# Allegro board pc054a_toplevel_27.brd
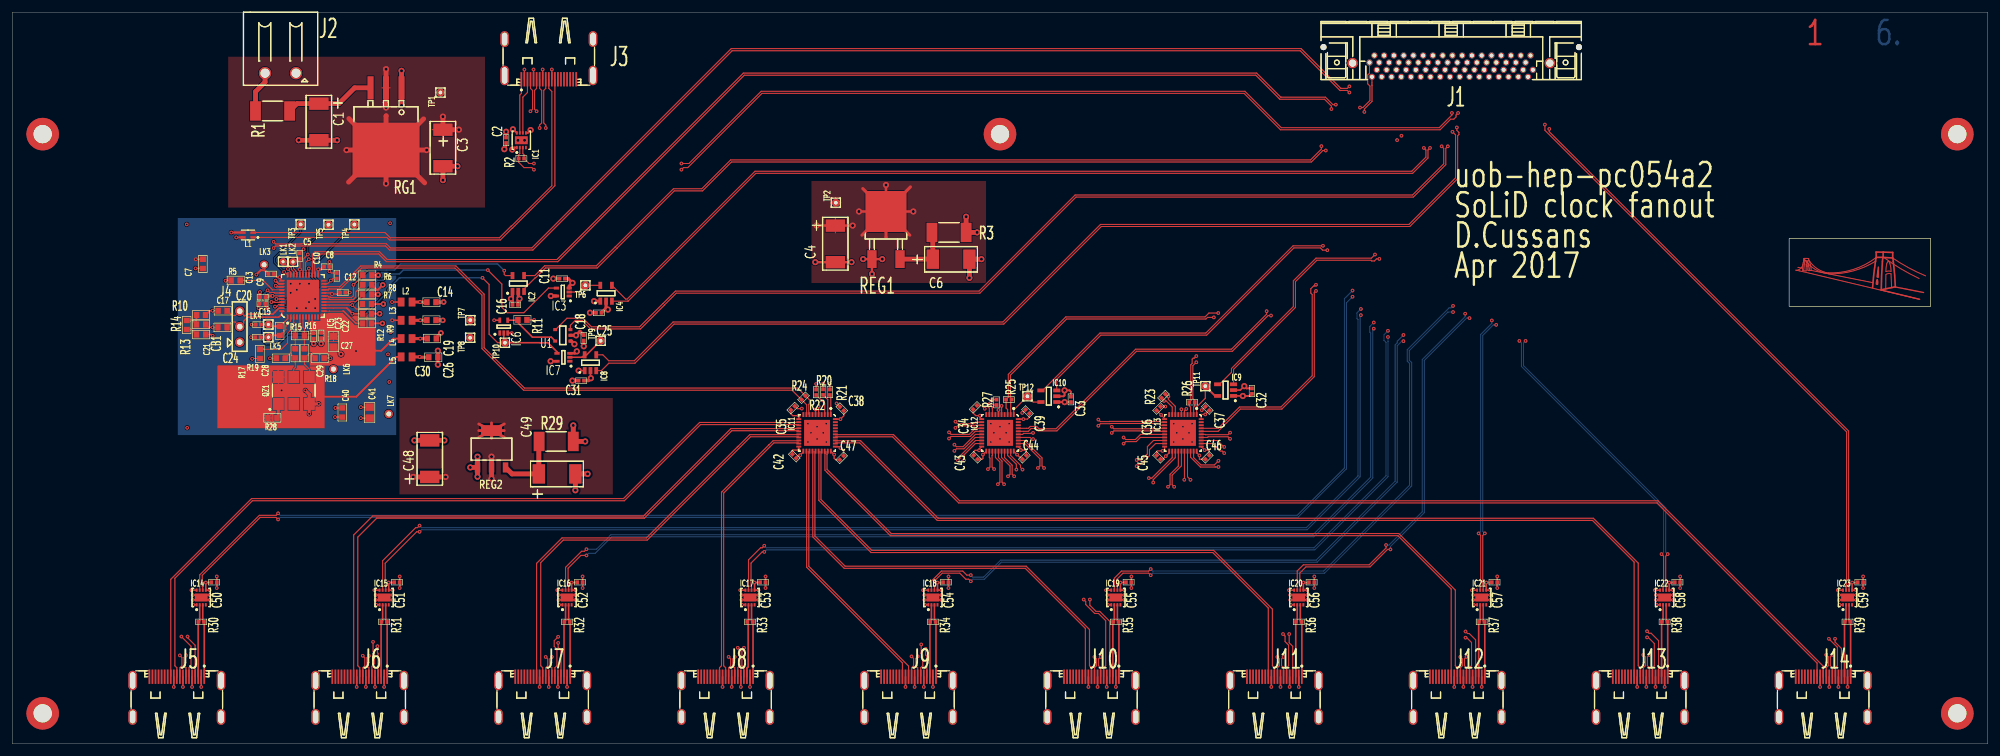
[diagram p0: board, top side]
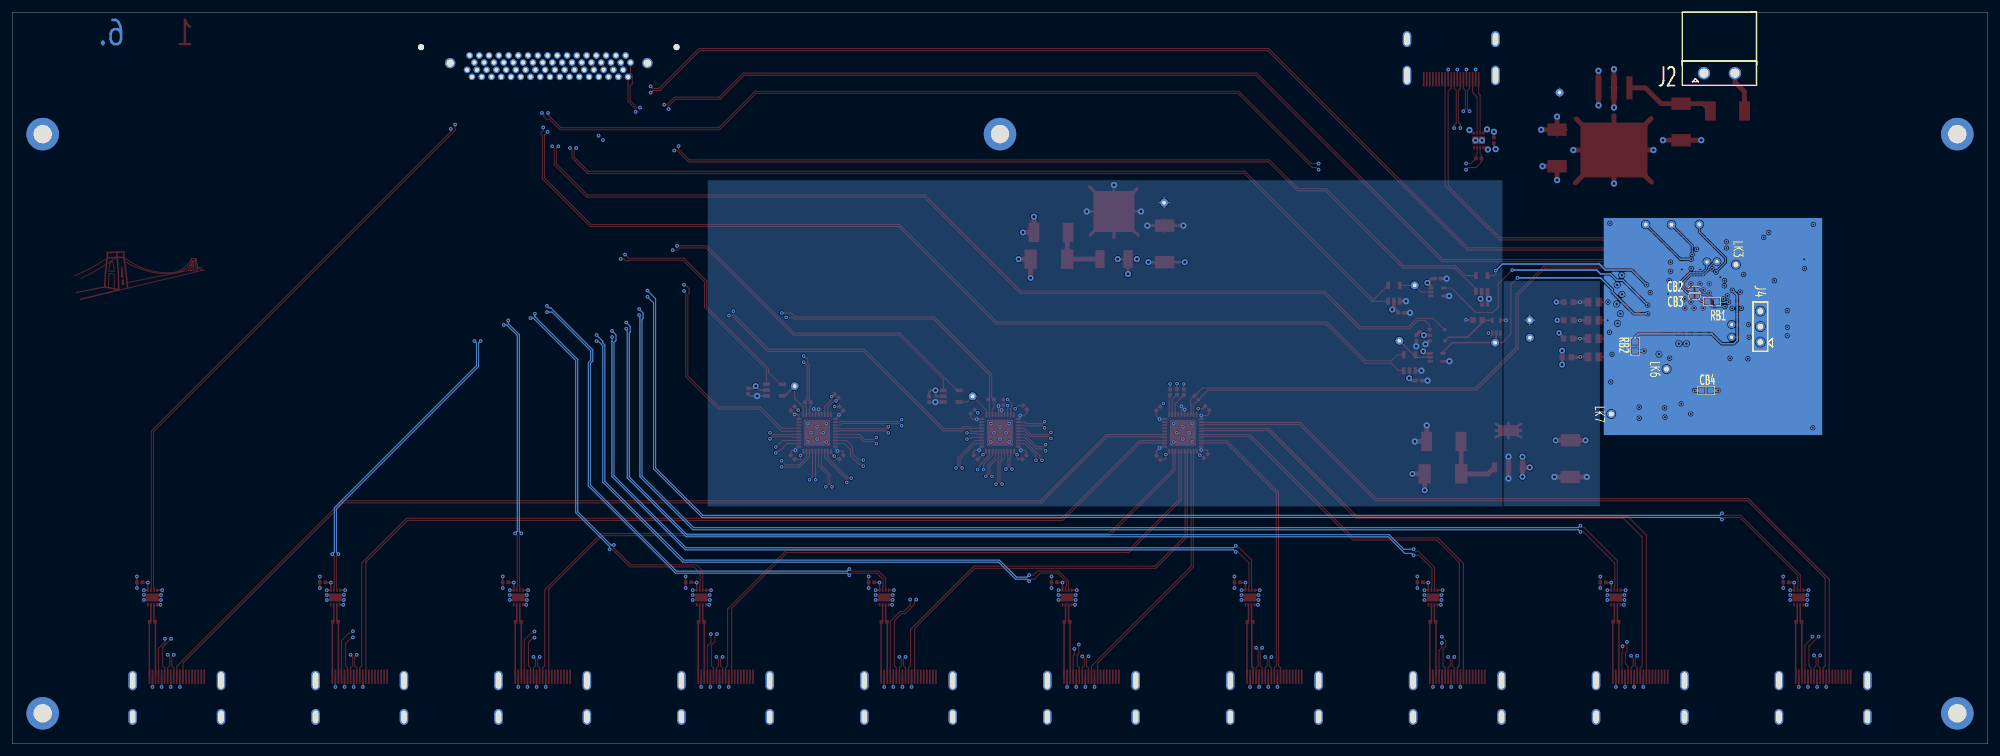
[diagram p1: board, bottom side, seen from below]

Outline 324 x 120 mm; copper layers: TOP, L2, L3, L4, L5, BOTTOM. Coordinates in mm from the lower left corner of the outline.
Outline path: 0,120 324,120 324,0 0,0 0,120

## Design rules (mm)
net group BUSY<0>: nets BUSY_N<0> BUSY_P<0>
net group BUSY<1>: nets BUSY_N<1> BUSY_P<1>
net group BUSY<2>: nets BUSY_N<2> BUSY_P<2>
net group BUSY<3>: nets BUSY_N<3> BUSY_P<3>
net group BUSY<4>: nets BUSY_N<4> BUSY_P<4>
net group BUSY<5>: nets BUSY_N<5> BUSY_P<5>
net group BUSY<6>: nets BUSY_N<6> BUSY_P<6>
net group BUSY<7>: nets BUSY_N<7> BUSY_P<7>
net group BUSY<8>: nets BUSY_N<8> BUSY_P<8>
net group BUSY<9>: nets BUSY_N<9> BUSY_P<9>
net group BUSY_FROM_FPGA: nets BUSY_FROM_FPGA_N BUSY_FROM_FPGA_P
net group CLK40<0>: nets CLK40_N<0> CLK40_P<0>
net group CLK40<1>: nets CLK40_N<1> CLK40_P<1>
net group CLK40<2>: nets CLK40_N<2> CLK40_P<2>
net group CLK40<3>: nets CLK40_N<3> CLK40_P<3>
net group CLK40<4>: nets CLK40_N<4> CLK40_P<4>
net group CLK40<5>: nets CLK40_N<5> CLK40_P<5>
net group CLK40<6>: nets CLK40_N<6> CLK40_P<6>
net group CLK40<7>: nets CLK40_N<7> CLK40_P<7>
net group CLK40<8>: nets CLK40_N<8> CLK40_P<8>
net group CLK40<9>: nets CLK40_N<9> CLK40_P<9>
net group CLK_FROM_FPGA: nets CLK_FROM_FPGA_N CLK_FROM_FPGA_P
net group CLK_IN: nets CLK_IN_N CLK_IN_P
net group CLK_IN_AC: nets CLK_IN_AC_N_1 CLK_IN_AC_P_1
net group CLK_RSTB: nets CLK_RSTB_N CLK_RSTB_P
net group SCL_FROM_FPGA: nets SCL_FROM_FPGA_N SCL_FROM_FPGA_P
net group SDA_FROM_FPGA: nets SDA_FROM_FPGA_N SDA_FROM_FPGA_P
net group SDA_TO_FPGA: nets SDA_TO_FPGA_N SDA_TO_FPGA_P
net group SYNC<0>: nets SYNC_N<0> SYNC_P<0>
net group SYNC<1>: nets SYNC_N<1> SYNC_P<1>
net group SYNC<2>: nets SYNC_N<2> SYNC_P<2>
net group SYNC<3>: nets SYNC_N<3> SYNC_P<3>
net group SYNC<4>: nets SYNC_N<4> SYNC_P<4>
net group SYNC<5>: nets SYNC_N<5> SYNC_P<5>
net group SYNC<6>: nets SYNC_N<6> SYNC_P<6>
net group SYNC<7>: nets SYNC_N<7> SYNC_P<7>
net group SYNC<8>: nets SYNC_N<8> SYNC_P<8>
net group SYNC<9>: nets SYNC_N<9> SYNC_P<9>
net group SYNC_FROM_FPGA: nets SYNC_FROM_FPGA_N SYNC_FROM_FPGA_P
net group SYNC_IN: nets SYNC_IN_N SYNC_IN_P
net group SYNC_SEL: nets SYNC_SEL_N SYNC_SEL_P
net group SYNC_TO_FPGA: nets SYNC_TO_FPGA_N SYNC_TO_FPGA_P
net group TRIG<0>: nets TRIG_N<0> TRIG_P<0>
net group TRIG<1>: nets TRIG_N<1> TRIG_P<1>
net group TRIG<2>: nets TRIG_N<2> TRIG_P<2>
net group TRIG<3>: nets TRIG_N<3> TRIG_P<3>
net group TRIG<4>: nets TRIG_N<4> TRIG_P<4>
net group TRIG<5>: nets TRIG_N<5> TRIG_P<5>
net group TRIG<6>: nets TRIG_N<6> TRIG_P<6>
net group TRIG<7>: nets TRIG_N<7> TRIG_P<7>
net group TRIG<8>: nets TRIG_N<8> TRIG_P<8>
net group TRIG<9>: nets TRIG_N<9> TRIG_P<9>
net group TRIG_FROM_FPGA: nets TRIG_FROM_FPGA_N TRIG_FROM_FPGA_P
net group TRIG_IN: nets TRIG_IN_N TRIG_IN_P
net group TRIG_SEL: nets TRIG_SEL_N TRIG_SEL_P
net group TRIG_TO_FPGA: nets TRIG_TO_FPGA_N TRIG_TO_FPGA_P
net group CLK_OUT_N: nets CLK_OUT_N<0> CLK_OUT_N<3> CLK_TO_FPGA_N CLKFB_N
net group CLK_OUT_P: nets CLK_OUT_P<0> CLK_OUT_P<3> CLK_TO_FPGA_P CLKFB_P
nets with their own width: min track width 0.17; nets VDD_OSC

## Placement (name value [footprint] x y rotation side)
C1  10uF  [C7343POL]  50.3 105 270 top
C2  100nF  [C0402]  81 99 270 top
C3  10uF  [C7343POL]  70.64 100.73 270 top
C4  10uF  [C7343POL]  135 85 270 top
C5  100nF  [C0402]  47.15 80.03 270 top
C6  10uF  [C7343POL]  150.99 79.49 0 top
C7  10uF  [C0603]  31.27 78.72 90 top
C8  100nF  [C0402]  51.58 78.26 180 top
C9  100nF  [C0402]  42.47 77.07 0 top
C10  100nF  [C0402]  53.24 76.78 270 top
C11  100nF  [C0402]  90.2 76.3 180 top
C12  100nF  [C0402]  54.2 74.02 180 top
C13  100nF  [C0402]  41.08 73.26 0 top
C14  100nF  [C0603]  68.75 72.44 180 top
C15  100nF  [C0402]  41.05 72.18 0 top
C16  100nF  [C0402]  82.5 72 180 top
C17  100nF  [C0603]  34.52 71.03 180 top
C18  100nF  [C0402]  96.19 70.69 180 top
C19  100nF  [C0603]  68.75 69.49 180 top
C20  100nF  [C0402]  40.37 68.76 0 top
C21  100nF  [C0603]  34.49 68.31 180 top
C22  100nF  [C0402]  50.68 66.96 90 top
C23  100nF  [C0402]  49.44 66.88 90 top
C24  100nF  [C0402]  40.28 66.7 0 top
C25  100nF  [C0402]  93.73 66.58 270 top
C26  100nF  [C0603]  68.82 66.47 180 top
C27  22uF  [C0805]  52.68 65.96 90 top
C28  100nF  [C0603]  46.43 64.05 270 top
C29  100nF  [C0603]  47.93 64.05 270 top
C30  100nF  [C0603]  69.06 63.4 180 top
C31  100nF  [C0402]  93.33 59.57 180 top
C32  100nF  [C0402]  203.32 57.85 270 top
C33  100nF  [C0402]  173.62 56.5 270 top
C34  100nF  [C0402]  157.91 55.18 225 top
C35  100nF  [C0402]  128.01 55.07 225 top
C36  100nF  [C0402]  188 55 225 top
C37  100nF  [C0402]  196 55 315 top
C38  100nF  [C0402]  136.06 54.97 315 top
C39  100nF  [C0402]  166.5 54.5 315 top
C40  10uF  [C0603]  54.13 54.34 270 top
C41  22uF  [C0805]  58.62 54.31 270 top
C42  100nF  [C0402]  128.26 47.18 135 top
C43  100nF  [C0402]  158 47 135 top
C44  100nF  [C0402]  166 47 45 top
C45  100nF  [C0402]  188 47 135 top
C46  100nF  [C0402]  196 47 45 top
C47  100nF  [C0402]  136.03 46.91 45 top
C48  10uF  [C7343POL]  68.47 43.77 90 top
C49  10uF  [C7343POL]  86.36 44.27 0 top
C50  100nF  [C0402]  33.1 26.5 180 top
C51  100nF  [C0402]  63.1 26.5 180 top
C52  100nF  [C0402]  93.1 26.5 180 top
C53  100nF  [C0402]  123.1 26.5 180 top
C54  100nF  [C0402]  153.1 26.5 180 top
C55  100nF  [C0402]  183.1 26.5 180 top
C56  100nF  [C0402]  213.1 26.5 180 top
C57  100nF  [C0402]  243.1 26.5 180 top
C58  100nF  [C0402]  273.1 26.5 180 top
C59  100nF  [C0402]  303.1 26.5 180 top
CB1  100nF  [C0603]  30.98 67.13 0 top
CB2  100nF  [C0402]  48.1 74.5 180 bottom
CB3  100nF  [C0402]  48.1 73.41 180 bottom
CB4  100nF  [C0603]  46.18 57.96 180 bottom
IC1  -  [PSON50P300X300X80-9N-R210X130]  83.5 99 90 top
IC2  -  [SOT95P280X145-5N]  83 75.5 90 top
IC3  -  [SOT65P210X110-5N]  90.3 74.1 180 top
IC4  -  [SOT95P280X145-5N]  97.4 73.9 90 top
IC5  -  [QFN50P700X700X90-45N-S530]  47.68 73.46 90 top
IC6  -  [SOT65P210X110-5N]  80.62 68.42 90 top
IC7  -  [SOT65P210X110-5N]  90.4 63.4 180 top
IC8  -  [SOT95P280X145-5N]  94.84 62.51 90 top
IC9  -  [SOT95P280X145-5N]  198.99 58.02 180 top
IC10  -  [SOT95P280X145-5N]  170.01 57.01 180 top
IC11  -  [QFN50P600X600X100-41N-S425]  132 51 270 top
IC12  -  [QFN50P600X600X100-41N-S425]  162 51 270 top
IC13  -  [QFN50P600X600X100-41N-S425]  192 51 270 top
IC14  -  [PSON50P300X300X80-9N-R210X130]  31 24 90 top
IC15  -  [PSON50P300X300X80-9N-R210X130]  61 24 90 top
IC16  -  [PSON50P300X300X80-9N-R210X130]  91 24 90 top
IC17  -  [PSON50P300X300X80-9N-R210X130]  121 24 90 top
IC18  -  [PSON50P300X300X80-9N-R210X130]  151 24 90 top
IC19  -  [PSON50P300X300X80-9N-R210X130]  181 24 90 top
IC20  -  [PSON50P300X300X80-9N-R210X130]  211 24 90 top
IC21  -  [PSON50P300X300X80-9N-R210X130]  241 24 90 top
IC22  -  [PSON50P300X300X80-9N-R210X130]  271 24 90 top
IC23  -  [PSON50P300X300X80-9N-R210X130]  301 24 90 top
J1  -  [MOLEX_71430-0008]  236 112.1 270 top
J2  -  [CON2MC_508]  46.55 110 270 top
J3  -  [SAMTEC_HDMI-19-01-X-SM]  88 109 180 top
J4  -  [CONHE13D3X1M]  37.31 65.89 90 top
J5  -  [SAMTEC_HDMI-19-01-X-SM]  27 11 0 top
J6  -  [SAMTEC_HDMI-19-01-X-SM]  57 11 0 top
J7  -  [SAMTEC_HDMI-19-01-X-SM]  87 11 0 top
J8  -  [SAMTEC_HDMI-19-01-X-SM]  117 11 0 top
J9  -  [SAMTEC_HDMI-19-01-X-SM]  147 11 0 top
J10  -  [SAMTEC_HDMI-19-01-X-SM]  177 11 0 top
J11  -  [SAMTEC_HDMI-19-01-X-SM]  207 11 0 top
J12  -  [SAMTEC_HDMI-19-01-X-SM]  237 11 0 top
J13  -  [SAMTEC_HDMI-19-01-X-SM]  267 11 0 top
J14  -  [SAMTEC_HDMI-19-01-X-SM]  297 11 0 top
L1  90ohm  [IND_WURTH_CNSW-0805]  38.68 83.46 180 top
L2  -  [INDC2012X90N]  64.68 72.46 180 top
L3  -  [INDC2012X90N]  64.68 69.46 180 top
L4  -  [INDC2012X90N]  64.68 66.46 180 top
L5  -  [INDC2012X90N]  64.68 63.46 180 top
LK1  -  [TP_HOLE_05]  44.42 79.07 90 top
LK2  -  [TP_HOLE_05]  46.06 79.05 90 top
LK3  -  [1-HOLE_0-8P]  41.31 78.58 90 top
LK4  -  [TP_HOLE_05]  42.01 68.77 90 top
LK5  -  [TP_HOLE_05]  42.01 66.69 90 top
LK6  -  [1-HOLE_0-8P]  52.68 61.46 90 top
LK7  -  [1-HOLE_0-8P]  61.76 54.1 90 top
NOREF  -  [unnamed]  319 100 0 top
NOREF#2  -  [unnamed]  5 5 0 top
NOREF#3  -  [#2]  0 99 0 top
NOREF#4  -  [unnamed]  5 100 0 top
NOREF#5  -  [#2]  0 0 0 top
NOREF#6  -  [#2]  0 100 0 top
NOREF#7  -  [#2]  0 0 90 top
NOREF#8  -  [#2]  0 120 0 top
NOREF#9  -  [#2]  0 0 90 top
NOREF#10  -  [unnamed]  162 100 0 top
NOREF#11  -  [#2]  27 11 0 top
NOREF#12  -  [unnamed]  319 5 0 top
NOREF#13  -  [#2]  -45 -88 0 top
NOREF#14  -  [#2]  303 76.6 180 bottom
QZ1  50MHz  [OSCSC254P500X700X150-6N_TXC_BF]  46.18 57.96 90 top
R1  1.5  [C2512]  39.9 103.8 0 top
R2  100  [C0402]  83.5 96 0 top
R3  1.5  [C2512]  156.44 83.88 180 top
R4  1k  [C0603]  58.24 76.86 0 top
R5  1k  [C0603]  36.65 76 0 top
R6  1k  [C0603]  58.23 75.29 180 top
R7  1k  [C0603]  58.21 73.71 180 top
R8  1k  [C0603]  58.2 72.13 0 top
R9  1k  [C0603]  58.19 70.55 0 top
R10  51  [C0603]  30.96 70.34 180 top
R11  1k  [C0603]  83.68 69.53 0 top
R12  1k  [C0603]  58.18 68.96 180 top
R13  51  [C0603]  30.98 68.79 180 top
R14  82  [C0603]  28.62 68.7 90 top
R15  100  [C0603]  43.87 67.74 90 top
R16  100  [C0603]  47.18 66.96 180 top
R17  1k  [C0603]  40.63 63.95 90 top
R18  XX  [C0603]  50.42 63.25 180 top
R19  XX  [C0603]  44.05 63.23 0 top
R20  1k  [C0402]  132.98 57.69 270 top
R21  1k  [C0402]  134.11 57.67 270 top
R22  1k  [C0402]  131.85 57.66 270 top
R23  100  [C0402]  188.81 57.05 225 top
R24  100  [C0402]  129.78 56.76 225 top
R25  100  [C0402]  163.45 56.47 0 top
R26  100  [C0402]  193.49 56.03 0 top
R27  100  [C0402]  161.42 56.01 90 top
R28  1k  [C0603]  42.68 53.46 180 top
R29  1.5  [C2512]  92.02 49.59 180 top
R30  100  [C0402]  31 20 0 top
R31  100  [C0402]  61 20 0 top
R32  100  [C0402]  91 20 0 top
R33  100  [C0402]  121 20 0 top
R34  100  [C0402]  151 20 0 top
R35  100  [C0402]  181 20 0 top
R36  100  [C0402]  211 20 0 top
R37  100  [C0402]  241 20 0 top
R38  100  [C0402]  271 20 0 top
R39  100  [C0402]  301 20 0 top
RB1  100  [C0603]  45.21 72.55 180 bottom
RB2  1k  [C0603]  57.86 65.17 90 bottom
REG1  CV  [TO252]  141 79.5 0 top
REG2  -  [SOT223]  80.91 45.33 180 top
RG1  3.3V  [TO263_3SH]  63.85 107.59 90 top
TP1  -  [TP_HOLE_06]  70.23 106.82 0 top
TP2  -  [TP_HOLE_06]  135.08 88.75 0 top
TP3  -  [TP_HOLE_06]  47.31 85.19 0 top
TP4  -  [TP_HOLE_06]  56.11 85.17 0 top
TP5  -  [TP_HOLE_06]  51.87 85.14 0 top
TP6  -  [TP_HOLE_06]  94 75.2 0 top
TP7  -  [TP_HOLE_06]  75.13 69.49 0 top
TP8  -  [TP_HOLE_06]  75.1 66.6 0 top
TP9  -  [TP_HOLE_06]  96.5 66.1 0 top
TP10  -  [TP_HOLE_06]  80.81 65.79 0 top
TP11  -  [TP_HOLE_06]  195.67 58.67 0 top
TP12  -  [TP_HOLE_06]  166.5 57 0 top
U1  -  [SOT23-5]  90.3 67 180 top

## Library data of the parts
C1 C3 C4 C6 C48 C49 = ELCAPTAN: part number: ELCAPTAN_SMD-10UF,25V; tolerance: 20%
C2 C5 C8-C13 C15 C16 C18 C20 C22-C25 C31-C39 C42-C47 C50-C59 CB2 CB3 = CAPCERSMDCL2: part number: CAPCERSMDCL2_0402-100NF,16V_GEN; tolerance: 10%
C7 C40 = CAPCERSMDCL2: part number: CAPCERSMDCL2_0603-10UF,6.3V; tolerance: 20%
C14 C17 C19 C21 C26 C28-C30 CB1 CB4 = CAPCERSMDCL2: part number: CAPCERSMDCL2_0603-100NF,16V; tolerance: 10%
C27 C41 = CAPCERSMDCL2: part number: CAPCERSMDCL2_0805-22UF,6.3V; tolerance: 15%
IC1 IC14-IC23 = DS90LV001: part number: DS90LV001TLD
IC2 IC4 IC8-IC10 = SN65LVDT2: part number: SN65LVDT2DBV
IC3 IC6 IC7 = 74LVC1G07: part number: SN74LVC1G07DCK
IC5 = SI5344: part number: SI5344B-B-GM
IC11-IC13 = CDCLVD1212: part number: CDCLVD1212RHA
J1 = CON68P: part number: CON68P-71430-0008
J2 = CON2P: part number: CON2P-MSTBA2,5/2-G-5,08
J3 J5-J14 = CON19P: part number: CON19P-HDMI-19-01-X-SM
J4 = CON3P: part number: CON3P-SIL254D
L1 = COMMON_MODE_LINE_FILTER: part number: COMMON_MODE_LINE_FILTER_4312-744231091,90OHM
L2-L5 = FERRITE: part number: FERRITE_C0805-LI0805H121R-10,LI0805H121R-10
LK1 LK2 LK4 LK5 = TP: part number: TP_HOLE-0.5MM
LK3 LK6 LK7 = 1-HOLE: part number: 1-HOLE_0-8-BASE
QZ1 = OSC_6P_EN_DIFFOUT: part number: BF-50.000MBE-T
R1 R3 R29 = RSMD2512: part number: RSMD2512_1W_GEN-1.5,5%; tolerance: 5%
R2 R23-R27 R30-R39 = RSMD0402: part number: RSMD0402_1/16W-100,1%; tolerance: 1%
R4-R9 R11 R12 R17 R28 RB2 = RSMD0603: part number: RSMD0603_1/10W-1K,1%; tolerance: 1%
R10 R13 = RSMD0603: part number: RSMD0603_1/10W-51,1%; tolerance: 1%
R14 = RSMD0603: part number: RSMD0603_1/10W-82,1%; tolerance: 1%
R15 R16 RB1 = RSMD0603: part number: RSMD0603_1/10W-100,1%; tolerance: 1%
R18 R19 = RSMD0603: part number: RSMD0603_1/10W-XX,1%; tolerance: 1%
R20-R22 = RSMD0402: part number: RSMD0402_1/16W-1K,1%; tolerance: 1%
REG1 = LM1117: part number: LM1117-DTX-2.5
REG2 = LM1117: part number: LM1117-MPX-1.8
RG1 = LM1085-4: part number: LM1085-4_TO263-LM1085IS-3.3/NOPB,3.3V
TP1-TP12 = TP: part number: TP_HOLE-0.6MM
U1 = SN65LVDS1

## Footprints (pads in the part's own frame, mm; a bottom-side part is the same pattern mirrored in y, then rotated)
1-HOLE_0-8P
  round 1.372 hole 0.813: 1(0,0)
C0402
  rect 0.6x0.6 smd: 1(-0.45,0) 2(0.45,0)
C0603
  rect 0.9x1 smd: 1(-0.75,0) 2(0.75,0)
C0805
  rect 1.2x1.4 smd: 1(-0.9,0) 2(0.9,0)
C2512
  rect 1.778x3.175 smd: 1(0,0) 2(5.6,0)
C7343POL
  rect 2.032x3.175 smd: 1(0,0) 2(6,0)
CON2MC_508
  round 2.032 hole 1.499: 1(0,0) 2(0,-5.08)
CONHE13D3X1M
  round 1.524 hole 0.914: 1(0,0) 2(2.54,0) 3(5.08,0)
IND_WURTH_CNSW-0805
  rect 0.9x0.4 smd: 1(-0.85,0.4) 2(0.85,0.4) 3(0.85,-0.4) 4(-0.85,-0.4)
INDC2012X90N
  rect 1.1x1.45 smd: 1(-0.9,0) 2(0.9,0)
MOLEX_71430-0008
  round 1 hole 1.75 unplated: (-2.175,20.95) (-2.175,-20.95)
  round 0.95 hole 0.65: 1(2.7,-13) 2(1.55,-12.2) 3(2.7,-11.4) 4(1.55,-10.6) 5(2.7,-9.8) 6(1.55,-9) 7(2.7,-8.2) 8(1.55,-7.4) 9(2.7,-6.6) 10(1.55,-5.8) 11(2.7,-5) 12(1.55,-4.2) 13(2.7,-3.4) 14(1.55,-2.6) 15(2.7,-1.8) 16(1.55,-1) 17(2.7,-0.2) 18(1.55,0.6) 19(2.7,1.4) 20(1.55,2.2) 21(2.7,3) 22(1.55,3.8) 23(2.7,4.6) 24(1.55,5.4) 25(2.7,6.2) 26(1.55,7) 27(2.7,7.8) 28(1.55,8.6) 29(2.7,9.4) 30(1.55,10.2) 31(2.7,11) 32(1.55,11.8) 33(2.7,12.6) 34(1.55,13.4) 35(0.35,-13.4) 36(-0.8,-12.6) 37(0.35,-11.8) 38(-0.8,-11) 39(0.35,-10.2) 40(-0.8,-9.4) 41(0.35,-8.6) 42(-0.8,-7.8) 43(0.35,-7) 44(-0.8,-6.2) 45(0.35,-5.4) 46(-0.8,-4.6) 47(0.35,-3.8) 48(-0.8,-3) 49(0.35,-2.2) 50(-0.8,-1.4) 51(0.35,-0.6) 52(-0.8,0.2) 53(0.35,1) 54(-0.8,1.8) 55(0.35,2.6) 56(-0.8,3.4) 57(0.35,4.2) 58(-0.8,5) 59(0.35,5.8) 60(-0.8,6.6) 61(0.35,7.4) 62(-0.8,8.2) 63(0.35,9) 64(-0.8,9.8) 65(0.35,10.6) 66(-0.8,11.4) 67(0.35,12.2) 68(-0.8,13)
  round 1.7 hole 1.2: 69(0.45,16.175) 70(0.45,-16.175)
OSCSC254P500X700X150-6N_TXC_BF
  rect 2x1.8 smd: 1(-2.2,2.54) 2(-2.2,0) 3(-2.2,-2.54) 4(2.2,-2.54) 5(2.2,0) 6(2.2,2.54)
PSON50P300X300X80-9N-R210X130
  rect 0.55x0.3 smd: 1(-1.2,0.75) 2(-1.2,0.25) 3(-1.2,-0.25) 4(-1.2,-0.75) 5(1.2,-0.75) 6(1.2,-0.25) 7(1.2,0.25) 8(1.2,0.75)
  rect 1.3x2.1 smd: 9(0,0)
QFN50P600X600X100-41N-S425
  rect 0.8x0.3 smd: 1(-3,2.25) 2(-3,1.75) 3(-3,1.25) 4(-3,0.75) 5(-3,0.25) 6(-3,-0.25) 7(-3,-0.75) 8(-3,-1.25) 9(-3,-1.75) 10(-3,-2.25) 21(3,-2.25) 22(3,-1.75) 23(3,-1.25) 24(3,-0.75) 25(3,-0.25) 26(3,0.25) 27(3,0.75) 28(3,1.25) 29(3,1.75) 30(3,2.25)
  rect 0.3x0.8 smd: 11(-2.25,-3) 12(-1.75,-3) 13(-1.25,-3) 14(-0.75,-3) 15(-0.25,-3) 16(0.25,-3) 17(0.75,-3) 18(1.25,-3) 19(1.75,-3) 20(2.25,-3) 31(2.25,3) 32(1.75,3) 33(1.25,3) 34(0.75,3) 35(0.25,3) 36(-0.25,3) 37(-0.75,3) 38(-1.25,3) 39(-1.75,3) 40(-2.25,3)
  rect 4.25x4.25 smd: 41(0,0)
QFN50P700X700X90-45N-S530
  rect 0.85x0.3 smd: 1(-3.45,2.5) 2(-3.45,2) 3(-3.45,1.5) 4(-3.45,1) 5(-3.45,0.5) 6(-3.45,0) 7(-3.45,-0.5) 8(-3.45,-1) 9(-3.45,-1.5) 10(-3.45,-2) 11(-3.45,-2.5) 23(3.45,-2.5) 24(3.45,-2) 25(3.45,-1.5) 26(3.45,-1) 27(3.45,-0.5) 28(3.45,0) 29(3.45,0.5) 30(3.45,1) 31(3.45,1.5) 32(3.45,2) 33(3.45,2.5)
  rect 0.3x0.85 smd: 12(-2.5,-3.45) 13(-2,-3.45) 14(-1.5,-3.45) 15(-1,-3.45) 16(-0.5,-3.45) 17(0,-3.45) 18(0.5,-3.45) 19(1,-3.45) 20(1.5,-3.45) 21(2,-3.45) 22(2.5,-3.45) 34(2.5,3.45) 35(2,3.45) 36(1.5,3.45) 37(1,3.45) 38(0.5,3.45) 39(0,3.45) 40(-0.5,3.45) 41(-1,3.45) 42(-1.5,3.45) 43(-2,3.45) 44(-2.5,3.45)
  rect 5.3x5.3 smd: 45(0,0)
SAMTEC_HDMI-19-01-X-SM
  rect 0.28x2.35 smd: 1(4.5,0) 2(4,0) 3(3.5,0) 4(3,0) 5(2.5,0) 6(2,0) 7(1.5,0) 8(1,0) 9(0.5,0) 10(0,0) 11(-0.5,0) 12(-1,0) 13(-1.5,0) 14(-2,0) 15(-2.5,0) 16(-3,0) 17(-3.5,0) 18(-4,0) 19(-4.5,0)
  oval 1.4x3.2 hole 0.9x2.7: 20(7.25,-0.62) 21(-7.25,-0.62)
  oval 1.4x2.6 hole 0.9x2.1: 22(7.25,-6.59) 23(-7.25,-6.59)
SOT23-5
  rect 0.635x0.508 smd: 1(-1.245,0.94) 2(-1.245,0) 3(-1.245,-0.94) 4(1.245,-0.94) 5(1.245,0.94)
SOT65P210X110-5N
  rect 0.85x0.45 smd: 1(-1.05,0.65) 2(-1.05,0) 3(-1.05,-0.65) 4(1.05,-0.65) 5(1.05,0.65)
SOT95P280X145-5N
  rect 1.15x0.6 smd: 1(-1.3,0.95) 2(-1.3,0) 3(-1.3,-0.95) 4(1.3,-0.95) 5(1.3,0.95)
SOT223
  rect 0.889x1.651 smd: 1(4.597,0) 2(2.299,0) 3(0,0)
  rect 3.429x1.778 smd: 4(2.299,-6.045)
TO252
  rect 1.524x2.921 smd: 1(0,0) 3(4.6,0)
  rect 6.731x6.731 smd: 2(2.3,7.81)
TO263_3SH
  rect 3.8x1 smd: 1(0,0) 2(0,2.54) 3(0,5.08)
  rect 9x11 smd: 4(-10.2,2.54)
TP_HOLE_05
  round 1.2 hole 0.5: 1(0,0)
TP_HOLE_06
  round 1.3 hole 0.6: 1(0,0)
unnamed
  round 5.334 hole 3: 1(0,0)

## Nets
GND_SIGNAL: C1.2(B<0>) C2.1(A<0>) C3.2(B<0>) C4.2(B<0>) C5.1(A<0>) C6.2(B<0>) C7.1(A<0>) C8.1(A<0>) C9.1(A<0>) C10.1(A<0>) C11.1(A<0>) C12.1(A<0>) C13.1(A<0>) C14.1(A<0>) C15.1(A<0>) C16.1(A<0>) C18.1(A<0>) C19.1(A<0>) C22.1(A<0>) C23.1(A<0>) C25.1(A<0>) C26.1(A<0>) C27.1(A<0>) C30.1(A<0>) C31.1(A<0>) C32.1(A<0>) C33.1(A<0>) C34.1(A<0>) C35.1(A<0>) C36.1(A<0>) C37.1(A<0>) C38.1(A<0>) C39.1(A<0>) C40.1(A<0>) C41.1(A<0>) C42.1(A<0>) C43.1(A<0>) C44.1(A<0>) C45.1(A<0>) C46.1(A<0>) C47.1(A<0>) C48.2(B<0>) C49.2(B<0>) C50.1(A<0>) C51.1(A<0>) C52.1(A<0>) C53.1(A<0>) C54.1(A<0>) C55.1(A<0>) C56.1(A<0>) C57.1(A<0>) C58.1(A<0>) C59.1(A<0>) CB1.2(B<0>) CB4.1(A<0>) IC1.1 IC1.9 IC2.2 IC3.3 IC4.2 IC5.45 IC6.3 IC7.3 IC8.2 IC9.2 IC10.2 IC11.21 IC11.30 IC11.41 IC12.21 IC12.30 IC12.41 IC13.21 IC13.30 IC13.41 IC14.1 IC14.9 IC15.1 IC15.9 IC16.1 IC16.9 IC17.1 IC17.9 IC18.1 IC18.9 IC19.1 IC19.9 IC20.1 IC20.9 IC21.1 IC21.9 IC22.1 IC22.9 IC23.1 IC23.9 J1.4(A<3>) J1.7(A<6>) J1.10(A<9>) J1.13(A<12>) J1.17(A<16>) J1.19(A<18>) J1.22(A<21>) J1.25(A<24>) J1.28(A<27>) J1.31(A<30>) J1.34(A<33>) J1.38(A<37>) J1.41(A<40>) J1.44(A<43>) J1.47(A<46>) J1.51(A<50>) J1.53(A<52>) J1.56(A<55>) J1.59(A<58>) J1.62(A<61>) J1.65(A<64>) J1.68(A<67>) J1.69 J1.70 J2.1(A<0>) J3.2(A<1>) J3.5(A<4>) J3.8(A<7>) J3.11(A<10>) J3.20 J3.21 J3.22 J3.23 J4.1(A<0>) J5.2(A<1>) J5.5(A<4>) J5.8(A<7>) J5.11(A<10>) J5.20 J5.21 J5.22 J5.23 J6.2(A<1>) J6.5(A<4>) J6.8(A<7>) J6.11(A<10>) J6.20 J6.21 J6.22 J6.23 J7.2(A<1>) J7.5(A<4>) J7.8(A<7>) J7.11(A<10>) J7.20 J7.21 J7.22 J7.23 J8.2(A<1>) J8.5(A<4>) J8.8(A<7>) J8.11(A<10>) J8.20 J8.21 J8.22 J8.23 J9.2(A<1>) J9.5(A<4>) J9.8(A<7>) J9.11(A<10>) J9.20 J9.21 J9.22 J9.23 J10.2(A<1>) J10.5(A<4>) J10.8(A<7>) J10.11(A<10>) J10.20 J10.21 J10.22 J10.23 J11.2(A<1>) J11.5(A<4>) J11.8(A<7>) J11.11(A<10>) J11.20 J11.21 J11.22 J11.23 J12.2(A<1>) J12.5(A<4>) J12.8(A<7>) J12.11(A<10>) J12.20 J12.21 J12.22 J12.23 J13.2(A<1>) J13.5(A<4>) J13.8(A<7>) J13.11(A<10>) J13.20 J13.21 J13.22 J13.23 J14.2(A<1>) J14.5(A<4>) J14.8(A<7>) J14.11(A<10>) J14.20 J14.21 J14.22 J14.23 LK3.1(A<0>) LK6.1(A<0>) QZ1.3 R5.1(A<0>) R6.1(A<0>) R7.1(A<0>) R12.1(A<0>) R17.1(A<0>) R18.1(A<0>) R19.1(A<0>) R20.1(A<0>) R21.1(A<0>) R22.1(A<0>) REG1.1(GND) REG2.1(GND) RG1.1(GND) TP8.1(A<0>) U1.2(GND)
P1V8: C14.2(B<0>) C48.1(A<0>) IC6.5 L2.1(A<0>) REG2.2(OUT) REG2.4 TP7.1(A<0>)
P2V5: C4.1(A<0>) C11.2(B<0>) C16.2(B<0>) C18.2(B<0>) C25.2(B<0>) C31.2(B<0>) C32.2(B<0>) C33.2(B<0>) C34.2(B<0>) C35.2(B<0>) C36.2(B<0>) C37.2(B<0>) C38.2(B<0>) C39.2(B<0>) C42.2(B<0>) C43.2(B<0>) C44.2(B<0>) C45.2(B<0>) C46.2(B<0>) C47.2(B<0>) IC2.1 IC3.5 IC4.1 IC7.5 IC8.1 IC9.1 IC10.1 IC11.5 IC11.6 IC11.11 IC11.20 IC11.31 IC11.40 IC12.5 IC12.6 IC12.11 IC12.20 IC12.31 IC12.40 IC13.5 IC13.6 IC13.11 IC13.20 IC13.31 IC13.40 R11.2(B<0>) R29.1(A<0>) REG1.2(OUT) TP2.1(A<0>) U1.1(VCC)
P3V3: C2.2(B<0>) C3.1(A<0>) C19.2(B<0>) C26.2(B<0>) C30.2(B<0>) C50.2(B<0>) C51.2(B<0>) C52.2(B<0>) C53.2(B<0>) C54.2(B<0>) C55.2(B<0>) C56.2(B<0>) C57.2(B<0>) C58.2(B<0>) C59.2(B<0>) IC1.5 IC1.8(EN) IC14.5 IC14.8(EN) IC15.5 IC15.8(EN) IC16.5 IC16.8(EN) IC17.5 IC17.8(EN) IC18.5 IC18.8(EN) IC19.5 IC19.8(EN) IC20.5 IC20.8(EN) IC21.5 IC21.8(EN) IC22.5 IC22.8(EN) IC23.5 IC23.8(EN) L3.1(A<0>) L4.1(A<0>) L5.1(A<0>) R3.1(A<0>) RG1.2(VOUT) RG1.4(CASE) TP1.1(A<0>)
P5V: J2.2(A<1>) R1.1(A<0>)
VDD_CLK40: C10.2(B<0>) C13.2(B<0>) C15.2(B<0>) C40.2(B<0>) C41.2(B<0>) IC5.21 IC5.26 IC5.32 IC5.39 IC5.40 L2.2(B<0>) LK7.1(A<0>) R4.2(B<0>) R8.2(B<0>) R9.2(B<0>)
VDD_OSC: CB4.2(B<0>) L5.2(B<0>) QZ1.6 R28.2(B<0>)
VDDA_CLK40: C22.2(B<0>) C23.2(B<0>) C27.2(B<0>) IC5.8 IC5.9 L4.2(B<0>) RB2.1(A<0>)
VDDO_CLK40: C5.2(B<0>) C7.2(B<0>) C8.2(B<0>) C9.2(B<0>) C12.2(B<0>) IC5.18(VDDO0) IC5.23(VDDO1) IC5.29(VDDO2) IC5.34(VDDO3) L3.2(B<0>)
BUSY_FROM_FPGA_N: IC1.3(INP) J1.52(A<51>) R2.2(B<0>)
BUSY_FROM_FPGA_P: IC1.2(INM*) J1.18(A<17>) R2.1(A<0>)
BUSY_N<0>: IC14.7(OUTM*) J1.54(A<53>)
BUSY_N<1>: IC15.7(OUTM*) J1.55(A<54>)
BUSY_N<2>: IC16.7(OUTM*) J1.57(A<56>)
BUSY_N<3>: IC17.7(OUTM*) J1.58(A<57>)
BUSY_N<4>: IC18.7(OUTM*) J1.60(A<59>)
BUSY_N<5>: IC19.7(OUTM*) J1.61(A<60>)
BUSY_N<6>: IC20.7(OUTM*) J1.63(A<62>)
BUSY_N<7>: IC21.7(OUTM*) J1.64(A<63>)
BUSY_N<8>: IC22.7(OUTM*) J1.66(A<65>)
BUSY_N<9>: IC23.7(OUTM*) J1.67(A<66>)
BUSY_P<0>: IC14.6(OUTP) J1.20(A<19>)
BUSY_P<1>: IC15.6(OUTP) J1.21(A<20>)
BUSY_P<2>: IC16.6(OUTP) J1.23(A<22>)
BUSY_P<3>: IC17.6(OUTP) J1.24(A<23>)
BUSY_P<4>: IC18.6(OUTP) J1.26(A<25>)
BUSY_P<5>: IC19.6(OUTP) J1.27(A<26>)
BUSY_P<6>: IC20.6(OUTP) J1.29(A<28>)
BUSY_P<7>: IC21.6(OUTP) J1.30(A<29>)
BUSY_P<8>: IC22.6(OUTP) J1.32(A<31>)
BUSY_P<9>: IC23.6(OUTP) J1.33(A<32>)
CLK40_N<0>: IC11.12(OUTP<0>) J5.12(A<11>)
CLK40_N<1>: IC11.14(OUTP<1>) J6.12(A<11>)
CLK40_N<2>: IC11.16(OUTP<2>) J7.12(A<11>)
CLK40_N<3>: IC11.18(OUTP<3>) J8.12(A<11>)
CLK40_N<4>: IC11.22(OUTP<4>) J9.12(A<11>)
CLK40_N<5>: IC11.24(OUTP<5>) J10.12(A<11>)
CLK40_N<6>: IC11.26(OUTP<6>) J11.12(A<11>)
CLK40_N<7>: IC11.28(OUTP<7>) J12.12(A<11>)
CLK40_N<8>: IC11.32(OUTP<8>) J13.12(A<11>)
CLK40_N<9>: IC11.34(OUTP<9>) J14.12(A<11>)
CLK40_P<0>: IC11.13(OUTN<0>) J5.10(A<9>)
CLK40_P<1>: IC11.15(OUTN<1>) J6.10(A<9>)
CLK40_P<2>: IC11.17(OUTN<2>) J7.10(A<9>)
CLK40_P<3>: IC11.19(OUTN<3>) J8.10(A<9>)
CLK40_P<4>: IC11.23(OUTN<4>) J9.10(A<9>)
CLK40_P<5>: IC11.25(OUTN<5>) J10.10(A<9>)
CLK40_P<6>: IC11.27(OUTN<6>) J11.10(A<9>)
CLK40_P<7>: IC11.29(OUTN<7>) J12.10(A<9>)
CLK40_P<8>: IC11.33(OUTN<8>) J13.10(A<9>)
CLK40_P<9>: IC11.35(OUTN<9>) J14.10(A<9>)
CLK_FROM_FPGA_N: C24.1(A<0>) J1.36(A<35>)
CLK_FROM_FPGA_P: C20.1(A<0>) J1.2(A<1>)
CLK_IN_AC_N_1: C21.1(A<0>) IC5.44(IN0*) J4.2(A<1>)
CLK_IN_AC_P_1: C17.1(A<0>) IC5.43(IN0) J4.3(A<2>)
CLK_IN_N: J3.12(A<11>) L1.1(2DOT<0>)
CLK_IN_P: J3.10(A<9>) L1.4(1DOT<0>)
CLK_OUT_N<0>: IC5.19(OUT0*) IC11.9(INP0) R24.2(B<0>)
CLK_OUT_N<3>: IC5.35(OUT3*)
CLK_OUT_P<0>: IC5.20(OUT0) IC11.8(INN0) R24.1(A<0>)
CLK_OUT_P<3>: IC5.36(OUT3)
CLK_RSTB_N: IC2.4(B*) J1.35(A<34>)
CLK_RSTB_P: IC2.3(A) J1.1(A<0>)
CLK_TO_FPGA_N: IC5.24(OUT1*) J1.37(A<36>)
CLK_TO_FPGA_P: IC5.25(OUT1) J1.3(A<2>)
CLKFB_N: CB3.1(A<0>) IC5.30(OUT2*) LK2.1(A<0>)
CLKFB_P: CB2.1(A<0>) IC5.31(OUT2) LK1.1(A<0>)
SCL: IC3.4(Y) IC5.14(SCLK) R8.1(A<0>)
SCL_FROM_FPGA_N: IC4.4(B*) J1.48(A<47>)
SCL_FROM_FPGA_P: IC4.3(A) J1.14(A<13>)
SDA: IC5.13(SDA/SDIO) IC6.2(A) IC7.4(Y) R9.1(A<0>) TP10.1(A<0>)
SDA_FROM_FPGA_N: IC8.4(B*) J1.49(A<48>)
SDA_FROM_FPGA_P: IC8.3(A) J1.15(A<14>)
SDA_TO_FPGA_N: J1.50(A<49>) U1.4(Y)
SDA_TO_FPGA_P: J1.16(A<15>) U1.3(Z)
SYNC_FROM_FPGA_N: IC12.2(INP1) J1.42(A<41>) R25.2(B<0>)
SYNC_FROM_FPGA_P: IC12.3(INN1) J1.8(A<7>) R25.1(A<0>)
SYNC_IN_N: IC12.9(INP0) J3.9(A<8>) R27.2(B<0>)
SYNC_IN_P: IC12.8(INN0) J3.7(A<6>) R27.1(A<0>)
SYNC_N<0>: IC12.12(OUTP<0>) J5.9(A<8>)
SYNC_N<1>: IC12.14(OUTP<1>) J6.9(A<8>)
SYNC_N<2>: IC12.16(OUTP<2>) J7.9(A<8>)
SYNC_N<3>: IC12.18(OUTP<3>) J8.9(A<8>)
SYNC_N<4>: IC12.22(OUTP<4>) J9.9(A<8>)
SYNC_N<5>: IC12.24(OUTP<5>) J10.9(A<8>)
SYNC_N<6>: IC12.26(OUTP<6>) J11.9(A<8>)
SYNC_N<7>: IC12.28(OUTP<7>) J12.9(A<8>)
SYNC_N<8>: IC12.32(OUTP<8>) J13.9(A<8>)
SYNC_N<9>: IC12.34(OUTP<9>) J14.9(A<8>)
SYNC_P<0>: IC12.13(OUTN<0>) J5.7(A<6>)
SYNC_P<1>: IC12.15(OUTN<1>) J6.7(A<6>)
SYNC_P<2>: IC12.17(OUTN<2>) J7.7(A<6>)
SYNC_P<3>: IC12.19(OUTN<3>) J8.7(A<6>)
SYNC_P<4>: IC12.23(OUTN<4>) J9.7(A<6>)
SYNC_P<5>: IC12.25(OUTN<5>) J10.7(A<6>)
SYNC_P<6>: IC12.27(OUTN<6>) J11.7(A<6>)
SYNC_P<7>: IC12.29(OUTN<7>) J12.7(A<6>)
SYNC_P<8>: IC12.33(OUTN<8>) J13.7(A<6>)
SYNC_P<9>: IC12.35(OUTN<9>) J14.7(A<6>)
SYNC_SEL: IC10.5(R) IC12.1(IN_SEL) TP12.1(A<0>)
SYNC_SEL_N: IC10.4(B*) J1.46(A<45>)
SYNC_SEL_P: IC10.3(A) J1.12(A<11>)
SYNC_TO_FPGA_N: IC12.36(OUTP<10>) J1.43(A<42>)
SYNC_TO_FPGA_P: IC12.37(OUTN<10>) J1.9(A<8>)
TRIG_FROM_FPGA_N: IC13.2(INP1) J1.39(A<38>) R26.2(B<0>)
TRIG_FROM_FPGA_P: IC13.3(INN1) J1.5(A<4>) R26.1(A<0>)
TRIG_IN_N: IC13.9(INP0) J3.6(A<5>) R23.2(B<0>)
TRIG_IN_P: IC13.8(INN0) J3.4(A<3>) R23.1(A<0>)
TRIG_N<0>: IC13.12(OUTP<0>) J5.6(A<5>)
TRIG_N<1>: IC13.14(OUTP<1>) J6.6(A<5>)
TRIG_N<2>: IC13.16(OUTP<2>) J7.6(A<5>)
TRIG_N<3>: IC13.18(OUTP<3>) J8.6(A<5>)
TRIG_N<4>: IC13.22(OUTP<4>) J9.6(A<5>)
TRIG_N<5>: IC13.24(OUTP<5>) J10.6(A<5>)
TRIG_N<6>: IC13.26(OUTP<6>) J11.6(A<5>)
TRIG_N<7>: IC13.28(OUTP<7>) J12.6(A<5>)
TRIG_N<8>: IC13.32(OUTP<8>) J13.6(A<5>)
TRIG_N<9>: IC13.34(OUTP<9>) J14.6(A<5>)
TRIG_P<0>: IC13.13(OUTN<0>) J5.4(A<3>)
TRIG_P<1>: IC13.15(OUTN<1>) J6.4(A<3>)
TRIG_P<2>: IC13.17(OUTN<2>) J7.4(A<3>)
TRIG_P<3>: IC13.19(OUTN<3>) J8.4(A<3>)
TRIG_P<4>: IC13.23(OUTN<4>) J9.4(A<3>)
TRIG_P<5>: IC13.25(OUTN<5>) J10.4(A<3>)
TRIG_P<6>: IC13.27(OUTN<6>) J11.4(A<3>)
TRIG_P<7>: IC13.29(OUTN<7>) J12.4(A<3>)
TRIG_P<8>: IC13.33(OUTN<8>) J13.4(A<3>)
TRIG_P<9>: IC13.35(OUTN<9>) J14.4(A<3>)
TRIG_SEL: IC9.5(R) IC13.1(IN_SEL) TP11.1(A<0>)
TRIG_SEL_N: IC9.4(B*) J1.45(A<44>)
TRIG_SEL_P: IC9.3(A) J1.11(A<10>)
TRIG_TO_FPGA_N: IC13.36(OUTP<10>) J1.40(A<39>)
TRIG_TO_FPGA_P: IC13.37(OUTN<10>) J1.6(A<5>)
UNNAMED_1_CON19P_I141_A_1_2: IC18.3(INP) J9.1(A<0>) R34.2(B<0>)
UNNAMED_1_CON19P_I141_A_1_3: IC14.3(INP) J5.1(A<0>) R30.2(B<0>)
UNNAMED_1_CON19P_I141_A_1_4: IC15.3(INP) J6.1(A<0>) R31.2(B<0>)
UNNAMED_1_CON19P_I141_A_1_5: IC16.3(INP) J7.1(A<0>) R32.2(B<0>)
UNNAMED_1_CON19P_I141_A_1_6: IC17.3(INP) J8.1(A<0>) R33.2(B<0>)
UNNAMED_1_CON19P_I141_A_1_7: IC23.3(INP) J14.1(A<0>) R39.2(B<0>)
UNNAMED_1_CON19P_I141_A_1_8: IC19.3(INP) J10.1(A<0>) R35.2(B<0>)
UNNAMED_1_CON19P_I141_A_1_9: IC20.3(INP) J11.1(A<0>) R36.2(B<0>)
UNNAMED_1_CON19P_I141_A_1_10: IC21.3(INP) J12.1(A<0>) R37.2(B<0>)
UNNAMED_1_CON19P_I141_A_1_11: IC22.3(INP) J13.1(A<0>) R38.2(B<0>)
UNNAMED_1_CON19P_I141_A_2: IC18.2(INM*) J9.3(A<2>) R34.1(A<0>)
UNNAMED_1_CON19P_I141_A_3: IC14.2(INM*) J5.3(A<2>) R30.1(A<0>)
UNNAMED_1_CON19P_I141_A_4: IC15.2(INM*) J6.3(A<2>) R31.1(A<0>)
UNNAMED_1_CON19P_I141_A_5: IC16.2(INM*) J7.3(A<2>) R32.1(A<0>)
UNNAMED_1_CON19P_I141_A_6: IC17.2(INM*) J8.3(A<2>) R33.1(A<0>)
UNNAMED_1_CON19P_I141_A_7: IC23.2(INM*) J14.3(A<2>) R39.1(A<0>)
UNNAMED_1_CON19P_I141_A_8: IC19.2(INM*) J10.3(A<2>) R35.1(A<0>)
UNNAMED_1_CON19P_I141_A_9: IC20.2(INM*) J11.3(A<2>) R36.1(A<0>)
UNNAMED_1_CON19P_I141_A_10: IC21.2(INM*) J12.3(A<2>) R37.1(A<0>)
UNNAMED_1_CON19P_I141_A_11: IC22.2(INM*) J13.3(A<2>) R38.1(A<0>)
UNNAMED_1_ELCAPTAN_I4_A: C1.1(A<0>) R1.2(B<0>) RG1.3(VIN)
UNNAMED_1_ELCAPTAN_I18_A: C6.1(A<0>) R3.2(B<0>) REG1.3(IN)
UNNAMED_1_ELCAPTAN_I19_A: C49.1(A<0>) R29.2(B<0>) REG2.3(IN)
UNNAMED_3_CAPCERSMDCL2_I44_B_1: C28.2(B<0>) QZ1.5(OUTN) R19.2(B<0>)
UNNAMED_3_CAPCERSMDCL2_I45_B_1: C29.2(B<0>) QZ1.4(OUTP) R18.2(B<0>)
UNNAMED_3_CAPCERSMDCL2_I152_B_1: C17.2(B<0>) L1.3(1<0>) R10.1(A<0>)
UNNAMED_3_CAPCERSMDCL2_I153_B_1: C21.2(B<0>) L1.2(2<0>) R13.1(A<0>)
UNNAMED_3_CAPCERSMDCL2_I178_A_1: CB1.1(A<0>) R14.1(A<0>)
UNNAMED_3_CAPCERSMDCL2_I179_B_1: C24.2(B<0>) IC5.2(IN1*) LK5.1(A<0>) R15.1(A<0>)
UNNAMED_3_CAPCERSMDCL2_I180_B_1: C20.2(B<0>) IC5.1(IN1) LK4.1(A<0>) R15.2(B<0>)
UNNAMED_3_CAPCERSMDCL2_I181_B_1: CB3.2(B<0>) IC5.42(IN3/FB_IN*) RB1.1(A<0>)
UNNAMED_3_CAPCERSMDCL2_I182_B_1: CB2.2(B<0>) IC5.41(IN3/FB_IN) RB1.2(B<0>)
UNNAMED_3_DS90LV001_I77_OUTM: IC1.7(OUTM*) J3.1(A<0>)
UNNAMED_3_DS90LV001_I77_OUTP: IC1.6(OUTP) J3.3(A<2>)
UNNAMED_3_OSC6PENDIFFOUT_I37__1: QZ1.1(ENDIS) R28.1(A<0>)
UNNAMED_3_RSMD0603_I57_B_1: IC5.38(I2C_SEL) RB2.2(B<0>)
UNNAMED_3_RSMD0603_I58_B_1: IC5.12(OE*) R12.2(B<0>)
UNNAMED_3_RSMD0603_I64_B_1: IC5.3(IN_SEL0) R17.2(B<0>)
UNNAMED_3_RSMD0603_I65_B_1: IC5.37(IN_SEL1) R5.2(B<0>)
UNNAMED_3_RSMD0603_I68_B_1: IC5.16(A0/CS) R6.2(B<0>)
UNNAMED_3_RSMD0603_I69_B_1: IC5.15(A1/SDO) R7.2(B<0>)
UNNAMED_3_RSMD0603_I156_B_1: R10.2(B<0>) R13.2(B<0>) R14.2(B<0>)
UNNAMED_10_74LVC1G07_I14_A: IC7.2(A) IC8.5(R) TP9.1(A<0>)
UNNAMED_10_74LVC1G07_I45_A: IC3.2(A) IC4.5(R) TP6.1(A<0>)
UNNAMED_10_74LVC1G07_I69_Y: IC6.4(Y) R11.1(A<0>) U1.5(D)
UNNAMED_10_CDCLVD1212_I2_INN1: IC11.3(INN1) R22.2(B<0>)
UNNAMED_10_CDCLVD1212_I2_INP1: IC11.2(INP1) R20.2(B<0>)
UNNAMED_10_CDCLVD1212_I2_INSEL: IC11.1(IN_SEL) R21.2(B<0>)
UNNAMED_10_FMCTLUCLOCKGEN_I9__1: IC5.28(LOS_XAXB*) TP5.1(A<0>)
UNNAMED_10_FMCTLUCLOCKGEN_I9_IN: IC5.33(INTR*) TP3.1(A<0>)
UNNAMED_10_FMCTLUCLOCKGEN_I9_LO: IC5.27(LOL*) TP4.1(A<0>)
UNNAMED_10_FMCTLUCLOCKGEN_I9_RS: IC2.5(R) IC5.17(RST*) R4.1(A<0>)
XA_1: C28.1(A<0>) IC5.5(XA) R16.2(B<0>)
XB_1: C29.1(A<0>) IC5.6(XB) R16.1(A<0>)

Pads without a net: IC1 4; IC3 1; IC5 4 7 10 11 22; IC6 1; IC7 1; IC11 4 7 10 36 37 38 39; IC12 4 7 10 38 39; IC13 4 7 10 38 39; IC14 4; IC15 4; IC16 4; IC17 4; IC18 4; IC19 4; IC20 4; IC21 4; IC22 4; IC23 4; J3 13 14 15 16 17 18 19; J5 13 14 15 16 17 18 19; J6 13 14 15 16 17 18 19; J7 13 14 15 16 17 18 19; J8 13 14 15 16 17 18 19; J9 13 14 15 16 17 18 19; J10 13 14 15 16 17 18 19; J11 13 14 15 16 17 18 19; J12 13 14 15 16 17 18 19; J13 13 14 15 16 17 18 19; J14 13 14 15 16 17 18 19; NOREF 1; NOREF#2 1; NOREF#4 1; NOREF#10 1; NOREF#12 1; QZ1 2

## Via types
v1: diameter 0.63, hole 0.33, TOP to BOTTOM, 63 vias
v2: diameter 0.6, hole 0.3, TOP to BOTTOM, 378 vias
v3: diameter 0.914, hole 0.406, TOP to BOTTOM, 12 vias
v4: diameter 1.016, hole 0.5, TOP to BOTTOM, 69 vias

## Routing (per net, layer and track width the routed paths; a pad name or vN(x,y) marks a point on that pad's centre or on a via; arc(x,y) is an arc through that point)
GND_SIGNAL: length 599.1
  TOP w0.17: R5.1 35.04,76 v1(35,75.96) ; v1(39.36,63.15) 39.41,63.2 R17.1 ; R19.1 v1(42.28,63.23) ; R18.1 v1(52.19,63.25)
  TOP w0.18: R20.1 v2(132.98,59.07) ; 165.16,47.07 165.29,47.07 C44.1 ; R21.1 v2(134.11,59.03) ; v1(52.03,77.51) 52.31,77.23 C10.1 ; R22.1 v2(131.85,59.02) ; IC13.30 194.25,47.75 v2(194.71,47.29) 194.71,46.69 194.71,46.68 C46.1 ; IC13.21 189.75,47.75 v2(189.19,47.19) 188.68,46.68 C45.1 ; C36.1 v2(189.11,55.32) ; v2(159.2,47.44) 159.2,46.84 159.05,46.68 C43.1 ; v2(159.5,54.95) 158.96,55.5 C34.1 ; C39.1 v2(165.64,54.28) ; C37.1 v2(195.09,54.73)
  TOP w0.2: 165.16,47.07 v2(164.8,47.44) 164.25,47.99 IC12.30 ; IC12.21 159.75,47.99 v2(159.2,47.44) ; IC11.30 v2(134.8,47.45) 134.8,46.84 135.05,46.59 C47.1 ; J3.11 v2(88.5,110.6) ; C38.1 v2(135.2,55.83) ; J3.2 v2(84,110.6) ; C42.1 129.06,47.35 v2(129.23,47.35) 129.75,47.87 IC11.21 ; C35.1 128.73,54.98 v2(129.5,54.98) ; J3.8 v2(87,110.6) ; J3.5 v2(85.5,110.6)
  TOP w0.25: 171.31,57.01 171.31,57.01 171.3,57 ; J6.2 v2(61,9.32) ; 180.6,24 IC19.9 181.5,24 ; 180.6,24 180.2,24.4 v2(179.6,24.4) ; 180.6,24 180.2,23.6 v2(179.6,23.6) ; 301.5,24 IC23.9 300.6,24 ; 301.5,24 301.5,23.7 301.6,23.6 v2(302.4,23.6) ; 301.5,24 301.9,24.4 v2(302.4,24.4) ; v2(92.4,24.4) 91.9,24.4 91.5,24 ; v2(242.4,24.4) 241.9,24.4 241.5,24 ; v2(272.4,24.4) 271.9,24.4 271.5,24 ; 181.5,24 181.9,23.6 v2(182.4,23.6) ; 181.5,24 181.9,24.4 v2(182.4,24.4) ; 241.5,24 241.9,23.6 v2(242.4,23.6) ; 241.5,24 IC21.9 240.6,24 ; J12.5 v2(239.5,9.32) ; v2(33.55,25.55) C50.1 v2(33.55,27.45) ; v2(239.6,23.6) 240.2,23.6 240.6,24 ; v2(123.55,25.55) C53.1 v2(123.55,27.45) ; C5.1 v1(47.78,81.11) ; 151.5,24 151.9,24.4 v2(152.4,24.4) ; 151.5,24 IC18.9 150.6,24 ; 151.5,24 151.5,23.7 151.6,23.6 v2(152.4,23.6) ; C41.1 v1(57.19,55.21) ; v2(299.6,24.4) 300.2,24.4 300.6,24 ; J12.8 v2(238,9.32) ; IC15.1 v2(59.7,22.8) ; v2(303.55,25.55) C59.1 v2(303.55,27.45) ; 91.5,24 91.9,23.6 v2(92.4,23.6) ; 91.5,24 IC16.9 90.6,24 ; v2(153.55,25.55) C54.1 v2(153.55,27.45) ; J6.8 v2(58,9.32) ; v4(202.06,58.67) 201.41,58.02 200.29,58.02 ; v2(32.4,24.4) 31.9,24.4 31.5,24 ; 61.5,24 IC15.9 60.6,24 ; 61.5,24 61.9,23.6 v2(62.4,23.6) ; 61.5,24 61.9,24.4 v2(62.4,24.4) ; 30.6,24 IC14.9 31.5,24 ; 30.6,24 30.2,24.4 v2(29.6,24.4) ; 30.6,24 30.2,23.6 v2(29.6,23.6) ; v2(213.55,27.45) C56.1 v2(213.55,25.55) ; v2(122.4,24.4) 121.9,24.4 121.5,24 ; v2(273.55,25.55) C58.1 v2(273.55,27.45) ; IC20.1 v2(209.7,22.8) ; 90.6,24 90.2,23.6 v2(89.6,23.6) ; 90.6,24 90.2,24.4 v2(89.6,24.4) ; J6.11 v2(56.5,9.32) ; 240.6,24 240.2,24.4 v2(239.6,24.4) ; 300.6,24 300.2,23.6 v2(299.6,23.6) ; 270.6,24 IC22.9 271.5,24 ; 270.6,24 270.2,24.4 v2(269.6,24.4) ; 270.6,24 270.2,23.6 v2(269.6,23.6) ; v2(93.55,27.45) C52.1 v2(93.55,25.55) ; 211.5,24 IC20.9 210.6,24 ; 211.5,24 211.9,23.6 v2(212.4,23.6) ; 211.5,24 211.9,24.4 v2(212.4,24.4) ; 120.6,24 IC17.9 121.5,24 ; 120.6,24 120.2,24.4 v2(119.6,24.4) ; 120.6,24 120.2,23.6 v2(119.6,23.6) ; J14.5 v2(299.5,9.32) ; 60.6,24 60.2,24.4 v2(59.6,24.4) ; 60.6,24 60.2,23.6 v2(59.6,23.6) ; v2(243.55,25.55) C57.1 v2(243.55,27.45) ; 150.6,24 150.2,24.4 v2(149.6,24.4) ; 150.6,24 150.2,23.6 v2(149.6,23.6) ; J7.2 v2(91,9.32) ; IC6.3 v2(81.92,67.37) ; IC14.1 v2(29.7,22.8) ; IC21.1 v2(239.7,22.8) ; C40.1 v1(53.01,55.09) ; J7.11 v2(86.5,9.32) ; J10.5 v2(179.5,9.32) ; J10.2 v2(181,9.32) ; J11.8 v2(208,9.32) ; 121.5,24 121.9,23.6 v2(122.4,23.6) ; v2(209.6,24.4) 210.2,24.4 210.6,24 ; J5.5 v2(29.5,9.32) ; 271.5,24 271.9,23.6 v2(272.4,23.6) ; IC8.2 94.84,60.03 v4(94.9,59.97) ; IC23.1 v2(299.7,22.8) ; v1(52.03,79.01) C8.1 v1(52.03,77.51) ; IC22.1 v2(269.7,22.8) ; 31.5,24 31.9,23.6 v2(32.4,23.6) ; J9.5 v2(149.5,9.32) ; J9.8 v2(148,9.32) ; v2(209.6,23.6) 210.2,23.6 210.6,24 ; J8.11 v2(116.5,9.32) ; J11.5 v2(209.5,9.32) ; J5.8 v2(28,9.32) ; J12.2 v2(241,9.32) ; C7.1 v1(30.07,77.97) ; IC19.1 v2(179.7,22.8) ; v2(63.55,27.45) C51.1 v2(63.55,25.55) ; v2(32.9,66.94) 32.7,67.13 CB1.2 ; IC17.1 v2(119.7,22.8) ; J10.11 v2(176.5,9.32) ; J7.8 v2(88,9.32) ; J13.8 v2(268,9.32) ; J14.8 v2(298,9.32) ; J7.5 v2(89.5,9.32) ; v2(183.55,27.45) C55.1 v2(183.55,25.55) ; J8.5 v2(119.5,9.32) ; J5.2 v2(31,9.32) ; J8.8 v2(118,9.32) ; J9.11 v2(146.5,9.32) ; J11.2 v2(211,9.32) ; J11.11 v2(206.5,9.32) ; J6.5 v2(59.5,9.32) ; IC18.1 v2(149.7,22.8) ; J13.11 v2(266.5,9.32) ; J13.2 v2(271,9.32) ; J5.11 v2(26.5,9.32) ; IC16.1 v2(89.7,22.8) ; J8.2 v2(121,9.32) ; J13.5 v2(269.5,9.32) ; J14.2 v2(301,9.32) ; J9.2 v2(151,9.32) ; J14.11 v2(296.5,9.32) ; J10.8 v2(178,9.32) ; J12.11 v2(236.5,9.32)
  TOP w0.3: IC1.1 82.32,97.8 v4(82,97.47) ; C27.1 52.78,65.06 v3(53.93,63.91) ; C15.1 40.42,72 v1(40.42,71.44) ; R6.1 58.98,75.24 59.73,74.48 59.99,74.48 v3(60.78,75.27) ; C12.1 v1(55.35,74.02) ; R7.1 v3(59.99,73.71) ; C23.1 v3(49.44,65.63) ; v1(40.05,76.97) 40.76,77.68 41.41,77.68 C9.1 ; v4(202.06,58.67) 202.43,58.3 C32.1 ; 171.3,57 172.42,57 172.59,57.16 v4(172.59,57.97) 173.4,57.97 173.62,57.75 C33.1 ; C2.1 v4(81,100.39) ; C22.1 v3(50.68,65.63) ; R12.1 v3(60.72,68.96)
  TOP w0.4: v4(92.59,64.37) 92.27,64.05 IC7.3 ; REG1.1 v4(142.69,79.5) ; REG1.1 v4(139.55,79.5) ; REG1.1 v4(141,77.06) ; v4(131.71,79) C4.2 v4(137.65,79)
  TOP w0.5: IC4.2 97.4,71.45 ; 97.4,71.45 C18.1 ; 97.4,71.45 97.46,71.45 v4(97.69,71.23) ; IC2.2 83,73.2 v4(83.2,73) 82.95,72.75 C16.1 ; QZ1.3 v1(50.28,55.76) ; QZ1.3 48.72,57.32 v1(48.08,57.96) ; QZ1.3 v1(48.72,54.12) ; C13.1 v1(40.63,74.09) ; v4(69.81,64.47) C30.1 v4(69.81,62.2) ; C19.1 70.59,69.49 v3(70.62,69.46) ; C25.1 93.13,67.64 93.11,67.64 v4(92.47,67) U1.2 ; v4(94.9,59.97) 94.5,59.57 C31.1 ; C14.1 70.73,72.44 v3(70.76,72.46) ; C11.1 91.19,76.3 v4(91.89,75.6) 91.35,75.06 IC3.3 ; v3(70.31,67.39) 69.57,66.65 C26.1
  TOP w0.8: v4(53.29,99) C1.2 v4(46.98,99) ; v4(92.36,41.59) C49.2 v4(94.36,44.27) ; REG2.1 v4(76.31,47.09) ; REG2.1 v4(76.31,43.81) ; REG2.1 v4(75.13,45.33) ; v4(158.96,79.49) C6.2 v4(156.99,76.42) ; v4(70.64,92.45) C3.2 v4(73.03,94.73) ; v4(63.85,110.39) RG1.1 v4(63.85,104.72) ; v4(65.97,49.77) C48.2 v4(70.87,49.77)
  L2 w0.154: J12.22 245.13,4.41 ; J12.22 244.25,5.89 ; J12.22 243.37,4.41 ; J12.22 244.25,2.93 ; J11.20 215.13,10.38 ; J11.20 214.25,8.6 ; J11.20 213.37,10.38 ; J11.20 214.25,12.16 ; J1.41 228.13,111.75 ; J1.41 227.4,112.48 ; J1.41 226.67,111.75 ; LK6.1 53.49,61.46 ; LK6.1 52.68,62.27 ; LK6.1 52.68,60.65 ; LK6.1 51.86,61.46 ; 239.07,110.55 J1.22 ; J1.22 240.53,110.55 ; J1.22 239.8,109.82 ; 74.27,66.6 TP8.1 ; TP8.1 75.1,65.77 ; TP8.1 75.93,66.6 ; TP8.1 75.1,67.43 ; J4.1 37.31,66.83 ; J4.1 37.31,64.94 ; J4.1 38.25,65.89 ; J4.1 36.37,65.89 ; 237.4,108.67 J1.19 ; J1.19 237.4,110.13 ; J1.19 236.67,109.4 ; J1.19 238.13,109.4 ; J7.23 79.75,5.89 ; J7.23 80.63,4.41 ; J7.23 79.75,2.93 ; J7.23 78.87,4.41 ; J1.51 235.4,112.48 ; J1.51 234.67,111.75 ; J1.51 236.13,111.75 ; J14.20 304.25,12.16 ; J14.20 303.37,10.38 ; J14.20 304.25,8.6 ; J14.20 305.13,10.38 ; J1.7 228.53,109.4 ; J1.7 227.07,109.4 ; J1.7 227.8,110.13 ; J1.7 227.8,108.67 ; 219.82,110.62 J1.70 ; J1.70 220.85,111.65 ; J1.70 219.82,112.68 ; J1.70 218.79,111.65 ; 123.37,10.38 J8.20 ; J8.20 125.13,10.38 ; J8.20 124.25,8.6 ; J8.20 124.25,12.16 ; J13.20 275.13,10.38 ; J13.20 274.25,8.6 ; J13.20 274.25,12.16 ; J13.20 273.37,10.38 ; J1.65 246.6,112.48 ; J1.65 247.33,111.75 ; J1.65 245.87,111.75 ; 95.25,114.11 J3.23 ; J3.23 95.25,117.07 ; J3.23 96.13,115.59 ; J3.23 94.37,115.59 ; 64.25,8.6 J6.20 ; J6.20 65.13,10.38 ; J6.20 63.37,10.38 ; J6.20 64.25,12.16 ; J1.25 242.2,110.13 ; J1.25 241.47,109.4 ; J1.25 242.93,109.4 ; J1.25 242.2,108.67 ; 224.67,110.55 J1.4 ; J1.4 226.13,110.55 ; J1.4 225.4,109.82 ; J9.23 139.75,5.89 ; J9.23 139.75,2.93 ; J9.23 140.63,4.41 ; J9.23 138.87,4.41 ; 138.87,10.38 J9.21 ; J9.21 140.63,10.38 ; J9.21 139.75,12.16 ; J9.21 139.75,8.6 ; 243.37,10.38 J12.20 ; J12.20 245.13,10.38 ; J12.20 244.25,12.16 ; J12.20 244.25,8.6 ; 235.07,109.4 J1.17 ; J1.17 236.53,109.4 ; J1.17 235.8,108.67 ; J1.17 235.8,110.13 ; 288.87,10.38 J14.21 ; J14.21 289.75,12.16 ; J14.21 289.75,8.6 ; J14.21 290.63,10.38 ; 63.37,4.41 J6.22 ; J6.22 65.13,4.41 ; J6.22 64.25,5.89 ; J6.22 64.25,2.93 ; J9.20 155.13,10.38 ; J9.20 154.25,12.16 ; J9.20 154.25,8.6 ; J9.20 153.37,10.38 ; J10.20 184.25,12.16 ; J10.20 185.13,10.38 ; J10.20 184.25,8.6 ; J10.20 183.37,10.38 ; 169.75,8.6 J10.21 ; J10.21 170.63,10.38 ; J10.21 169.75,12.16 ; J10.21 168.87,10.38 ; 273.37,4.41 J13.22 ; J13.22 274.25,5.89 ; J13.22 275.13,4.41 ; J13.22 274.25,2.93 ; J5.20 34.25,12.16 ; J5.20 33.37,10.38 ; J5.20 34.25,8.6 ; J5.20 35.13,10.38 ; J12.21 230.63,10.38 ; J12.21 229.75,8.6 ; J12.21 229.75,12.16 ; J12.21 228.87,10.38 ; 34.25,2.93 J5.22 ; J5.22 33.37,4.41 ; J5.22 35.13,4.41 ; J5.22 34.25,5.89 ; 224.27,112.9 J1.38 ; J1.38 225.73,112.9 ; J1.38 225,113.63 ; J1.38 225,112.17 ; 248.27,112.9 J1.68 ; J1.68 249.73,112.9 ; J1.68 249,113.63 ; J1.68 249,112.17 ; J10.23 169.75,5.89 ; J10.23 169.75,2.93 ; J10.23 168.87,4.41 ; J10.23 170.63,4.41 ; 109.75,8.6 J8.21 ; J8.21 109.75,12.16 ; J8.21 110.63,10.38 ; J8.21 108.87,10.38 ; J12.23 230.63,4.41 ; J12.23 229.75,2.93 ; J12.23 228.87,4.41 ; J12.23 229.75,5.89 ; 108.87,4.41 J8.23 ; J8.23 110.63,4.41 ; J8.23 109.75,5.89 ; J8.23 109.75,2.93 ; 49.75,2.93 J6.23 ; J6.23 49.75,5.89 ; J6.23 50.63,4.41 ; J6.23 48.87,4.41 ; 94.37,109.62 J3.21 ; J3.21 95.25,111.4 ; J3.21 95.25,107.84 ; J3.21 96.13,109.62 ; J14.23 290.63,4.41 ; J14.23 289.75,5.89 ; J14.23 288.87,4.41 ; J14.23 289.75,2.93 ; 232.6,108.67 J1.13 ; J1.13 231.87,109.4 ; J1.13 233.33,109.4 ; J1.13 232.6,110.13 ; 238.67,112.9 J1.56 ; J1.56 240.13,112.9 ; J1.56 239.4,112.17 ; J1.56 239.4,113.63 ; J10.22 184.25,5.89 ; J10.22 183.37,4.41 ; J10.22 185.13,4.41 ; J10.22 184.25,2.93 ; J3.20 80.75,111.4 ; J3.20 79.87,109.62 ; J3.20 80.75,107.84 ; J3.20 81.63,109.62 ; 94.25,8.6 J7.20 ; J7.20 93.37,10.38 ; J7.20 94.25,12.16 ; J7.20 95.13,10.38 ; 258.87,10.38 J13.21 ; J13.21 259.75,12.16 ; J13.21 260.63,10.38 ; J13.21 259.75,8.6 ; J7.22 94.25,5.89 ; J7.22 95.13,4.41 ; J7.22 94.25,2.93 ; J7.22 93.37,4.41 ; 124.25,2.93 J8.22 ; J8.22 123.37,4.41 ; J8.22 125.13,4.41 ; J8.22 124.25,5.89 ; J7.21 80.63,10.38 ; J7.21 78.87,10.38 ; J7.21 79.75,8.6 ; J7.21 79.75,12.16 ; J14.22 305.13,4.41 ; J14.22 303.37,4.41 ; J14.22 304.25,5.89 ; J14.22 304.25,2.93 ; 244.2,112.17 J1.62 ; J1.62 243.47,112.9 ; J1.62 244.93,112.9 ; J1.62 244.2,113.63 ; J1.10 230.93,110.55 ; J1.10 229.47,110.55 ; J1.10 230.2,109.82 ; J1.44 230.53,112.9 ; J1.44 229.07,112.9 ; J1.44 229.8,113.63 ; J1.44 229.8,112.17 ; J1.31 247,110.13 ; J1.31 247,108.67 ; J1.31 247.73,109.4 ; J1.31 246.27,109.4 ; J5.23 20.63,4.41 ; J5.23 19.75,2.93 ; J5.23 19.75,5.89 ; J5.23 18.87,4.41 ; LK3.1 41.31,79.39 ; LK3.1 40.49,78.58 ; LK3.1 42.12,78.58 ; LK3.1 41.31,77.77 ; 198.87,10.38 J11.21 ; J11.21 200.63,10.38 ; J11.21 199.75,8.6 ; J11.21 199.75,12.16 ; 154.25,2.93 J9.22 ; J9.22 155.13,4.41 ; J9.22 153.37,4.41 ; J9.22 154.25,5.89 ; J1.47 232.93,111.75 ; J1.47 232.2,112.48 ; J1.47 231.47,111.75 ; J1.53 237,112.48 ; J1.53 236.27,111.75 ; J1.53 237.73,111.75 ; J13.23 260.63,4.41 ; J13.23 258.87,4.41 ; J13.23 259.75,5.89 ; J13.23 259.75,2.93 ; J11.22 214.25,5.89 ; J11.22 213.37,4.41 ; J11.22 215.13,4.41 ; J11.22 214.25,2.93 ; J3.22 81.63,115.59 ; J3.22 80.75,117.07 ; J3.22 79.87,115.59 ; J3.22 80.75,114.11 ; J5.21 19.75,12.16 ; J5.21 19.75,8.6 ; J5.21 20.63,10.38 ; J5.21 18.87,10.38 ; J11.23 199.75,5.89 ; J11.23 200.63,4.41 ; J11.23 199.75,2.93 ; J11.23 198.87,4.41 ; J1.69 253.21,111.65 ; J1.69 252.18,112.68 ; J1.69 251.15,111.65 ; J1.69 252.18,110.62 ; 45.35,110 J2.1 ; J2.1 46.55,111.19 ; J2.1 46.55,108.8 ; J2.1 47.75,110 ; J1.59 241.8,112.48 ; J1.59 242.53,111.75 ; J1.59 241.07,111.75 ; 248.67,110.55 J1.34 ; J1.34 250.13,110.55 ; J1.34 249.4,111.28 ; J1.34 249.4,109.82 ; 48.87,10.38 J6.21 ; J6.21 49.75,8.6 ; J6.21 49.75,12.16 ; J6.21 50.63,10.38 ; 243.87,110.55 J1.28 ; J1.28 244.6,109.82 ; J1.28 245.33,110.55
  L5 w0.154: 52.68,60.65 LK6.1 ; LK6.1 52.68,62.27 ; LK6.1 53.49,61.46 ; LK6.1 51.86,61.46 ; LK3.1 42.12,78.58 ; LK3.1 41.31,79.39 ; LK3.1 40.49,78.58 ; LK3.1 41.31,77.77 ; 37.31,64.94 J4.1 ; J4.1 38.25,65.89 ; J4.1 37.31,66.83 ; J4.1 36.37,65.89
  BOTTOM w0.5: CB4.1 v1(48.08,57.96)
  vias: v1(45.68,75.46) v1(45.68,73.96) v1(46.68,74.46) v1(46.68,71.46) v1(47.18,75.46) v1(48.18,71.46) v1(48.68,75.46) v1(48.68,72.46) v1(49.68,72.96) v1(49.68,71.46) v2(28.63,85.19) v2(28.7,51.83) v2(61.63,63.88) v2(61.84,59.35) v2(61.98,85.39) v2(62.05,67.5) v2(130.5,52.5) v2(130.5,49.5) v2(131,51) v2(132,52) v2(132,50) v2(133,51) v2(133.5,52.5) v2(133.5,49.5) v2(160.5,52.5) v2(160.5,49.5) v2(161,51) v2(162,52) v2(162,50) v2(163,51) v2(163.5,52.5) v2(163.5,49.5) v2(190.5,52.5) v2(190.5,49.5) v2(191,51) v2(192,52) v2(192,50) v2(193,51) v2(193.5,52.5) v2(193.5,49.5) v4(82.95,98.98) v4(84.03,98.99)
P1V8: length 31.7
  TOP w0.25: IC6.5 v2(79.04,69.47)
  TOP w0.454: 76.52,51.38 78.61,51.38 ; 78.61,51.38 76.52,52.46 ; 78.61,51.38 78.61,52.64 ; 78.61,51.38 76.52,50.29 ; 78.61,51.38 80.71,51.38 ; 78.61,51.38 80.71,52.46 ; 78.61,51.38 78.61,50.11 ; 78.61,51.38 80.71,50.29
  TOP w0.5: C14.2 66.91,72.44 v1(66.89,72.46) L2.1
  TOP w0.8: v4(71.07,43.77) C48.1 v4(65.77,43.77) ; v4(78.61,43.51) v4(78.61,47.1)
  BOTTOM w0.154: TP7.1 75.13,70.32 ; TP7.1 74.3,69.49 ; TP7.1 75.13,68.66 ; TP7.1 75.96,69.49
P2V5: length 111.9
  TOP w0.154: 135,86.2 C4.1 135,83.8 ; 134.25,88.75 TP2.1 ; TP2.1 135.08,87.92 ; TP2.1 135.91,88.75 ; TP2.1 135.08,89.58
  TOP w0.18: C46.2 196.32,48.01 196.16,48.17 v2(195.55,48.17) 195.55,48.2 IC13.31 ; IC13.20 189,48.38 v2(188.66,48.04) 187.8,48.04 187.68,47.92 C45.2 ; C43.2 157.68,47.92 157.9,48.14 v2(158.57,48.14) ; v2(165.83,53.25) 166.49,53.25 166.82,53.58 C39.2 ; v2(158.71,53.83) 158.02,53.83 157.59,54.26 C34.2 ; v2(192.56,54.92) 192.25,54.62 IC13.5 ; IC13.11 189,53.36 v2(188.41,53.95) C36.2 ; IC13.40 195,53.97 195.06,54.03 v2(195.67,54.03) C37.2 ; IC13.6 v2(191.75,54.87)
  TOP w0.2: IC12.31 165.43,48.32 v2(165.43,48.17) 166.07,48.17 166.32,47.92 C44.2 ; v2(158.57,48.14) 158.57,48.32 IC12.20 ; 127.94,47.5 127.94,48.1 128.01,48.17 v2(129,48.17) IC11.20 ; C35.2 127.69,54.15 128.01,53.83 v2(129,53.83) IC11.11 ; IC12.6 v2(161.75,54.75) ; v2(158.71,53.83) 158.71,53.54 IC12.11 ; IC12.5 v2(162.25,55.42) ; C47.2 136.35,47.99 v2(135.82,48.52) 135.59,48.75 IC11.31 ; IC11.5 v2(132.25,55.35) ; C38.2 136.38,53.8 v2(135.83,53.25) IC11.40 ; IC11.6 v2(131.75,54.83) ; IC12.40 v2(165.83,53.25)
  TOP w0.25: v4(201.83,57.05) 201.81,57.07 200.29,57.07 ; IC8.1 v4(92.9,61.21) ; R11.2 v2(85.59,69.53) ; 171.31,56.06 171.31,56.06 171.3,56.05
  TOP w0.3: C32.2 202.97,57.05 v4(201.83,57.05) ; C33.2 v4(172.59,56.05) 172.59,56.05 171.3,56.05
  TOP w0.4: 143.25,87.31 v4(138.87,87.31) ; 143.3,87.33 v4(143.3,91.66) ; v4(131.93,85) C4.1 v4(137.83,85) ; IC7.5 v4(88.3,62.75) ; 143.32,87.31 v4(147.78,87.31)
  TOP w0.5: C18.2 95.74,70.7 v4(94.76,70.7) ; 147.21,83.42 143.32,87.31 REG1.2 ; 147.31,91.34 143.3,87.33 REG1.2 ; 92.88,59.57 v4(91.88,59.57) ; v4(92.21,65.55) 91.7,66.06 U1.1 ; REG1.2 143.26,87.31 ; REG1.2 143.3,83.12 143.34,83.08 ; 143.26,87.31 139.5,91.07 ; 143.26,87.31 143.25,87.31 139.36,83.42 ; C16.2 82.05,72.74 v4(81.8,72.99) 82.05,73.24 IC2.1 ; IC3.5 v4(88.33,73.45) ; C25.2 v4(93.73,65.2) ; IC4.1 v4(95.42,72.6) ; C11.2 v4(88.75,76.3)
  TOP w0.8: v4(92.02,52.22) R29.1 v4(93.97,49.59)
  BOTTOM w0.154: TP2.1 135.91,88.75 ; TP2.1 135.08,87.92 ; TP2.1 134.25,88.75 ; TP2.1 135.08,89.58
P3V3: length 127.6
  TOP w0.154: 70.23,105.99 TP1.1 ; TP1.1 69.4,106.82 ; TP1.1 71.06,106.82 ; TP1.1 70.23,107.65 ; 68.87,100.73 C3.1 70.64,99.53 ; 60.63,107.59 RG1.2 61.99,107.59
  TOP w0.25: C56.2 212.6,26.45 v2(211.75,26.45) IC20.5 v2(212.4,25.2) ; C54.2 152.6,26.45 v2(151.75,26.45) IC18.5 v2(152.4,25.2) ; IC18.8 v2(149.4,25.2) ; v2(182.4,25.2) IC19.5 v2(181.75,26.45) 182.6,26.45 C55.2 ; C51.2 62.6,26.45 v2(61.75,26.45) IC15.5 v2(62.4,25.2) ; IC22.8 v2(269.4,25.2) ; IC14.8 v2(29.4,25.2) ; IC16.8 v2(89.4,25.2) ; C59.2 302.6,26.45 v2(301.75,26.45) IC23.5 v2(302.4,25.2) ; v2(242.4,25.2) IC21.5 v2(241.75,26.45) 242.6,26.45 C57.2 ; v2(92.4,25.2) IC16.5 v2(91.75,26.45) 92.6,26.45 C52.2 ; IC21.8 v2(239.4,25.2) ; v2(32.4,25.2) IC14.5 v2(31.75,26.45) 32.6,26.45 C50.2 ; IC23.8 v2(299.4,25.2) ; C53.2 122.6,26.45 v2(121.75,26.45) IC17.5 v2(122.4,25.2) ; v2(272.4,25.2) IC22.5 v2(271.75,26.45) 272.6,26.45 C58.2 ; IC19.8 v2(179.4,25.2) ; IC15.8 v2(59.4,25.2) ; IC20.8 v2(209.4,25.2) ; IC17.8 v2(119.4,25.2)
  TOP w0.3: v4(85.01,100.67) 84.54,100.2 IC1.5 ; v4(80.71,97.53) 81,97.82 C2.2 ; v4(82.12,100.78) 82.17,100.78 IC1.8
  TOP w0.5: C30.2 66.89,63.4 v1(66.83,63.46) L5.1 ; C26.2 66.92,66.47 v1(66.91,66.46) L4.1 ; L3.1 v1(66.92,69.46) 67.98,69.46 C19.2
  TOP w0.8: 62.36,97.39 67.47,102.5 ; 62.36,97.39 v4(67.97,97.39) ; 62.36,97.39 62.26,97.39 ; v4(61.31,110.65) RG1.2 v4(61.31,104.37) ; 62.26,97.39 67.64,92.01 ; 62.26,97.39 RG1.4 ; RG1.4 60.43,97.39 ; RG1.4 61.31,102.98 61.34,103.01 ; RG1.4 v4(61.31,91.89) ; 60.39,97.39 v4(54.83,97.39) ; 60.39,97.39 55.22,102.56 ; 60.39,97.39 60.43,97.39 ; 60.43,97.39 55.16,92.12 ; v4(156.44,86.46) R3.1 v4(158.24,83.88) ; v4(70.64,102.87) C3.1 v4(73.25,100.73)
  L5 w0.154: 70.23,105.99 TP1.1 ; TP1.1 70.23,107.65 ; TP1.1 71.06,106.82 ; TP1.1 69.4,106.82
P5V: length 6.8
  TOP w0.8: R1.1 39.91,103.81 39.91,106.97 41.47,108.53 J2.2
VDD_CLK40: length 20.9
  TOP w0.17: IC5.39 v1(42.7,73.46) ; v1(45.23,77.89) 45.23,77.82 45.68,77.37 IC5.32 ; v1(48.65,77.96) 48.68,77.93 IC5.26 ; IC5.40 v1(43.33,72.96) ; v1(52.27,75.99) 51.74,75.46 51.13,75.46
  TOP w0.18: v1(52.27,75.99) 52.6,76.33 C10.2
  TOP w0.25: L2.2 v1(62.3,72.46) ; C40.2 v1(52.95,53.59) ; C41.2 v1(57.18,53.41)
  TOP w0.3: R8.2 v3(60.87,72.13) ; R4.2 v3(60.02,76.86) ; C15.2 41.5,71.84 v1(41.92,71.42) ; R9.2 v3(60.26,70.55)
  TOP w0.5: C13.2 41.73,73.46 v1(42.7,73.46)
  L3 w0.154: 61.76,53.28 LK7.1 ; LK7.1 60.94,54.1 ; LK7.1 62.57,54.1 ; LK7.1 61.76,54.91
VDD_OSC: length 34
  TOP w0.17: 41.32,52.78 R28.2 ; R28.2 41.32,54.14 ; R28.2 41.3,53.46 ; R28.2 41.93,54.14 ; R28.2 41.93,52.78 ; R28.2 42.56,53.46 ; R28.2 42.54,54.14 ; R28.2 42.54,52.78 ; 42.58,61.34 QZ1.6 ; QZ1.6 44.7,61.34 ; QZ1.6 44.7,58.98 ; QZ1.6 42.56,60.16 ; QZ1.6 43.64,58.98 ; QZ1.6 43.64,61.34 ; QZ1.6 42.58,58.98 ; QZ1.6 44.72,60.16
  TOP w0.3: 50.93,56.9 50.96,56.93 56.42,56.93 62.95,63.46 L5.2
  BOTTOM w0.5: CB4.2 v1(44.18,57.96)
VDDA_CLK40: length 26
  TOP w0.154: C22.2 51.26,67.41 ; C22.2 50.68,67.99 ; C22.2 50.1,67.99 ; C22.2 50.1,67.41 ; C22.2 51.26,67.99 ; 51.7,67.7 C27.2 ; C27.2 53.66,66.86 ; C27.2 51.7,66.86 ; C27.2 52.68,67.74 ; C27.2 52.68,65.98 ; C27.2 53.66,66.02 ; C27.2 51.7,66.02 ; C27.2 53.66,67.7 ; 48.86,67.91 C23.2 ; C23.2 49.44,67.91 ; C23.2 48.86,67.33 ; C23.2 50.02,67.91 ; C23.2 50.02,67.33
  TOP w0.17: 49.18,69.36 49.64,68.9 ; 49.18,69.36 49.18,69.11 ; 49.18,69.36 IC5.9 ; 49.16,68.59 48.68,69.07 IC5.8
  TOP w0.3: L4.2 62.51,66.46 60.52,64.47 58.98,64.47 58.94,64.43
  BOTTOM w0.3: RB2.1 v1(56.39,64.42)
VDDO_CLK40: length 12
  TOP w0.17: IC5.29 v1(47.18,77.81) 47.18,79.55 C5.2 ; 51.13,73.96 52.27,73.96 v1(52.46,73.77) 53.5,73.77 C12.2 ; IC5.23 v1(50.18,77.81) ; IC5.34 43.88,76.31 v1(43.88,76.55)
  TOP w0.25: C7.2 v1(30.12,79.47) ; L3.2 v1(62.32,69.46)
  TOP w0.3: v1(50.18,77.81) 50.68,77.81 C8.2 ; v1(43.88,76.55) 43.44,76.55 C9.2
BUSY_FROM_FPGA_N: length 173.9
  TOP w0.17: v2(85.57,95.18) 84.77,95.18 R2.2 83.95,96.61 83.75,96.81 IC1.3 ; v2(236.11,103.47) 236.11,103.13 234.03,101.06 208.14,101.06 202.17,107.02 122.83,107.02 110.99,95.18 v2(109.75,95.18)
  L4 w0.17: v2(236.11,103.47) 236.45,103.81 236.45,105.26 236.57,105.38 236.57,107.01 235.57,108 235.57,108.54 235.11,109 235.11,109.69 235.88,110.45 235.88,110.93 236.2,111.25 J1.52 ; v2(85.57,95.18) 85.9,94.85 109.41,94.85 v2(109.75,95.18)
BUSY_FROM_FPGA_P: length 173.7
  TOP w0.17: IC1.2 83.25,96.81 83.05,96.61 R2.1 83.05,95.39 83.94,94.51 85.23,94.51 v2(85.57,94.17) ; v2(109.75,94.17) 110.09,94.51 110.79,94.51 122.97,106.68 202.03,106.68 208,100.72 234.18,100.72 235.91,102.45 236.42,102.45 236.79,102.82 236.79,103.13 v2(237.12,103.47)
  L4 w0.17: J1.18 236.6,107.46 236.91,107.15 236.91,105.24 236.79,105.12 236.79,103.81 v2(237.12,103.47) ; v2(85.57,94.17) 85.9,94.51 109.41,94.51 v2(109.75,94.17)
